# Altium PCB LM2576_BOARD.PcbDoc
Units mm, origin at the board's own origin, x right, y up, seen from the top; angles counter-clockwise.
Board outline 40.28 x 30.25 mm, 2 copper layers (Top Layer, Bottom Layer), stack 1.071 mm thick; 14 components, 5 nets, 39 pads, 35 vias.
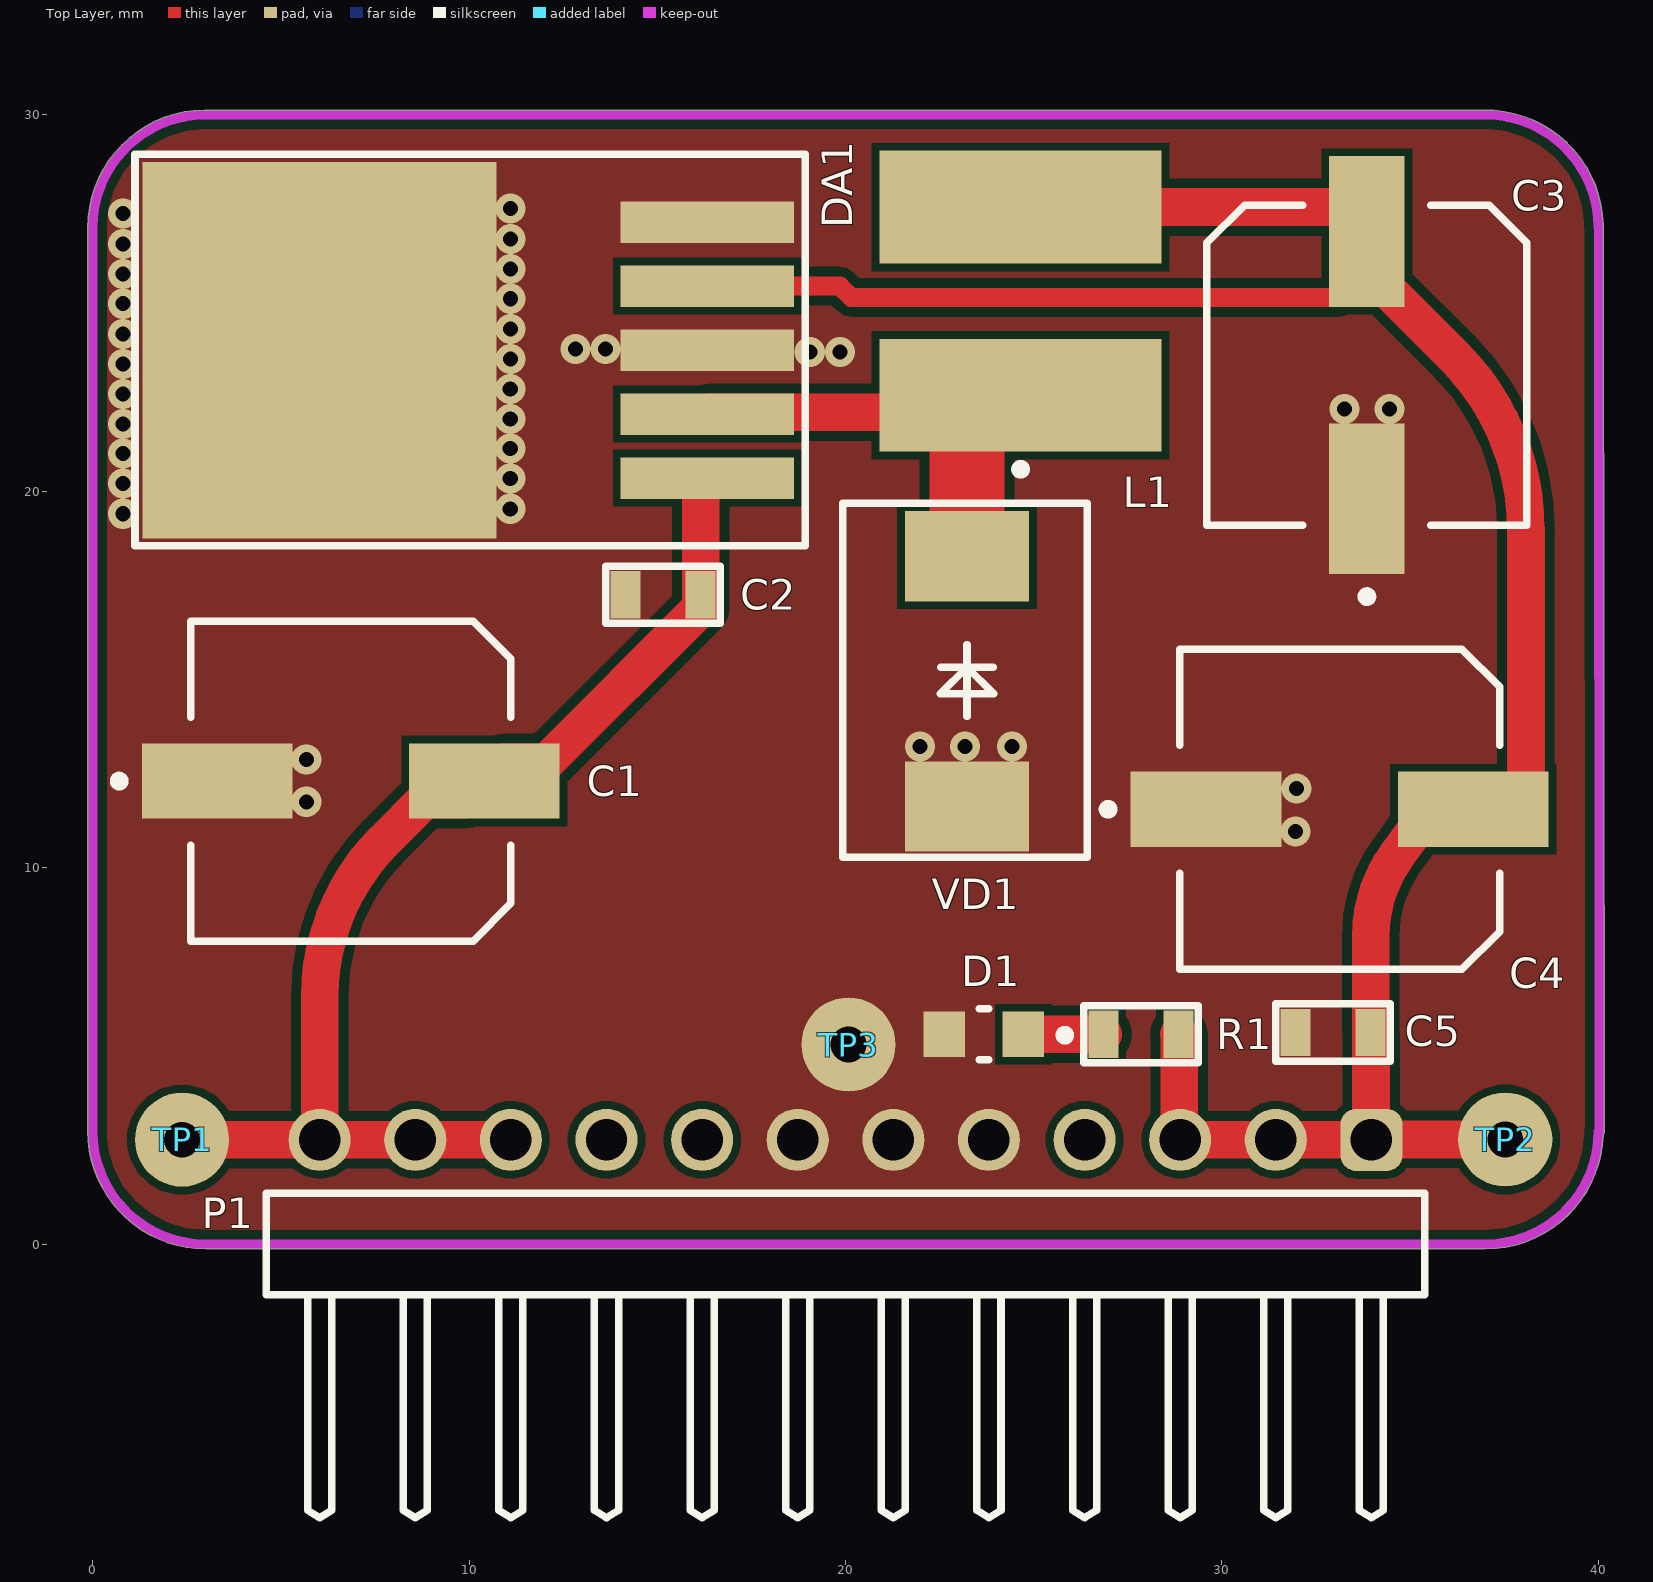
[diagram p0: Top Layer view]
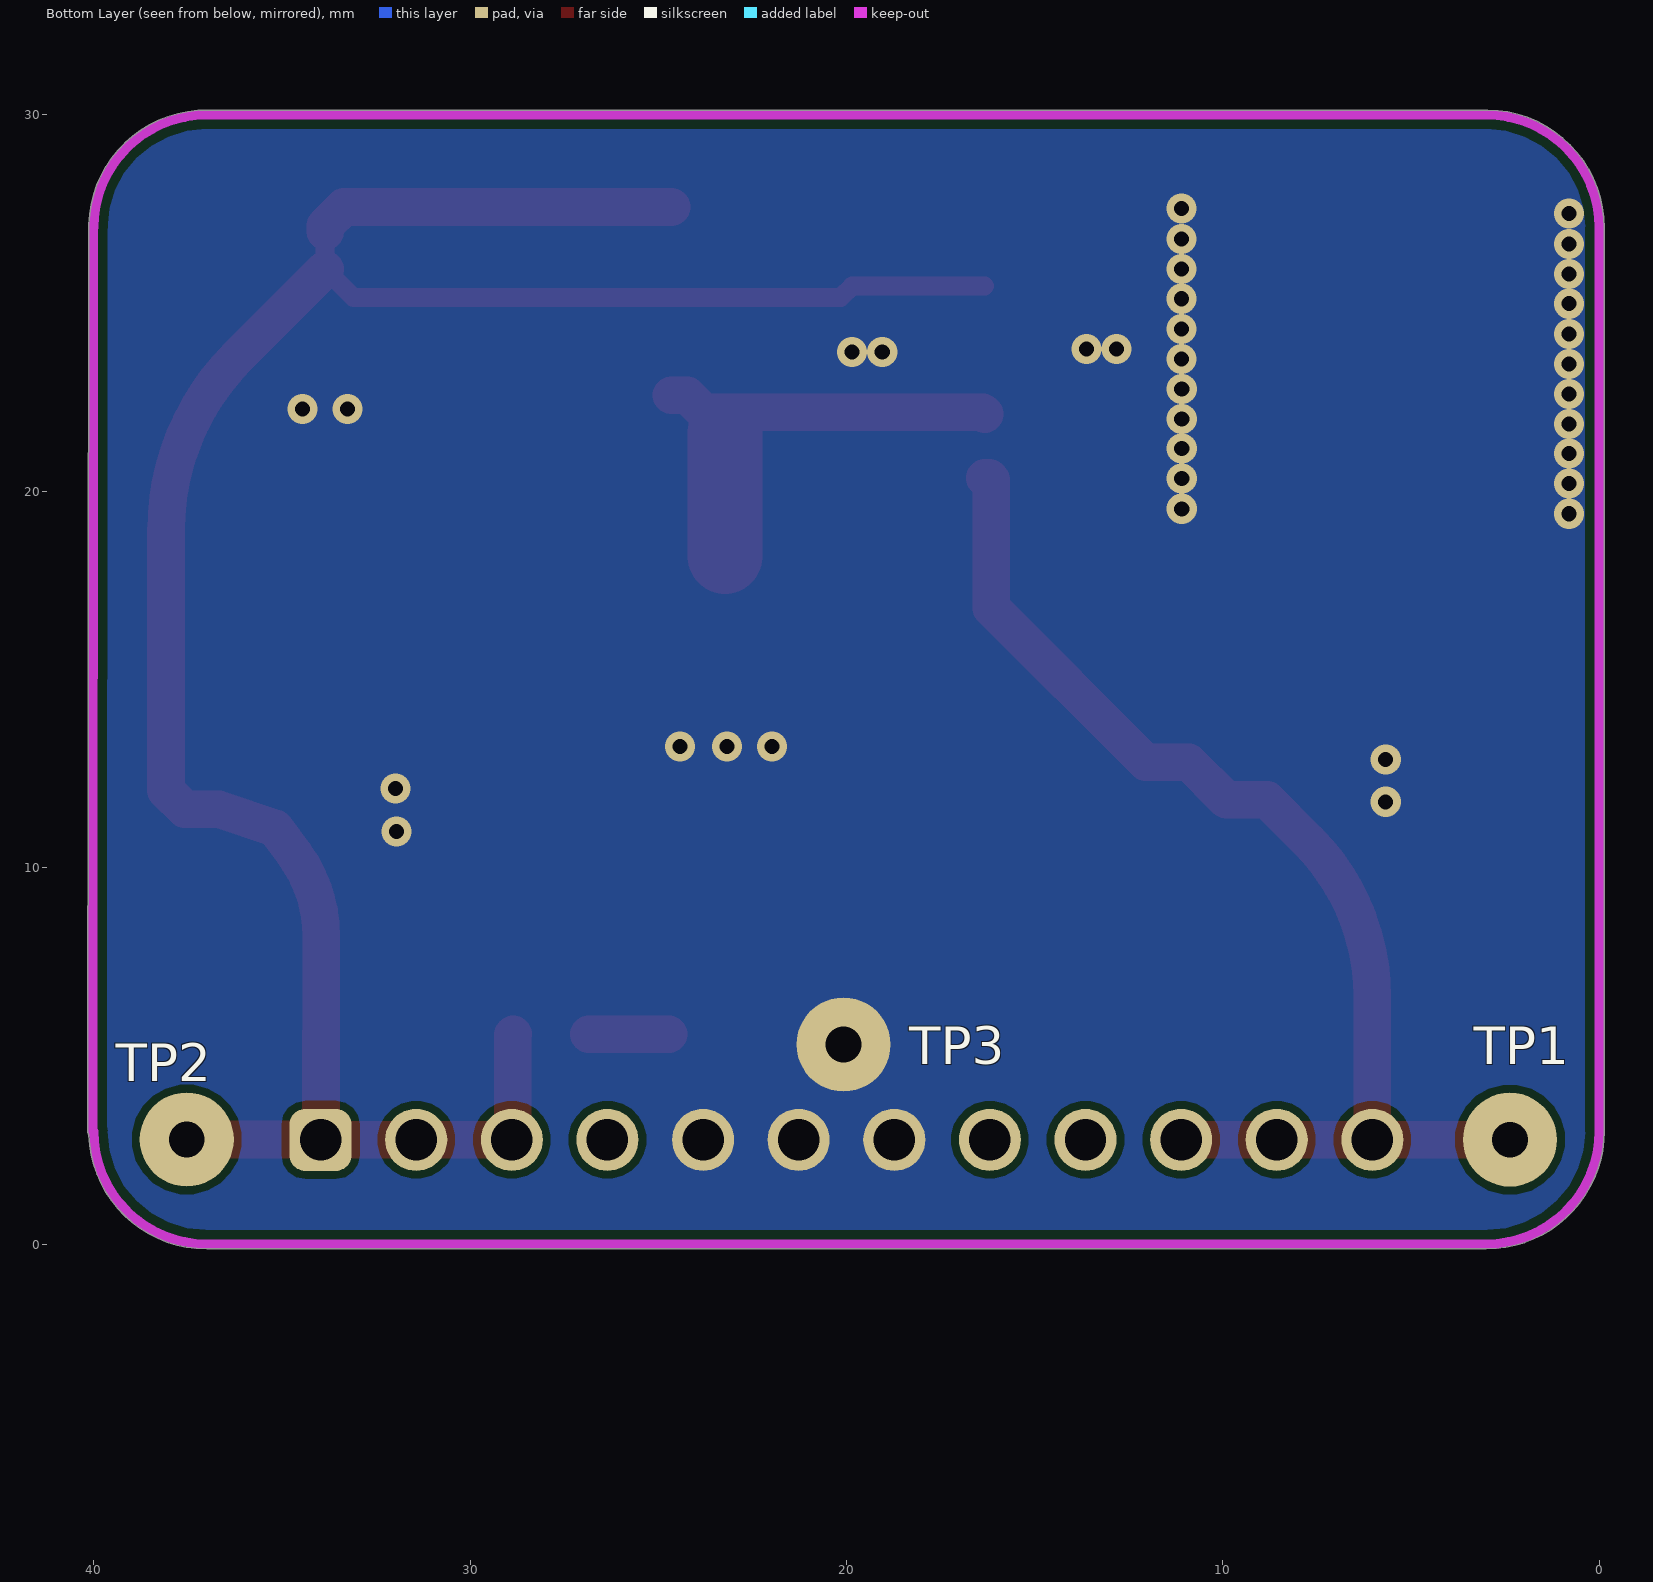
[diagram p1: Bottom Layer view, seen from below]
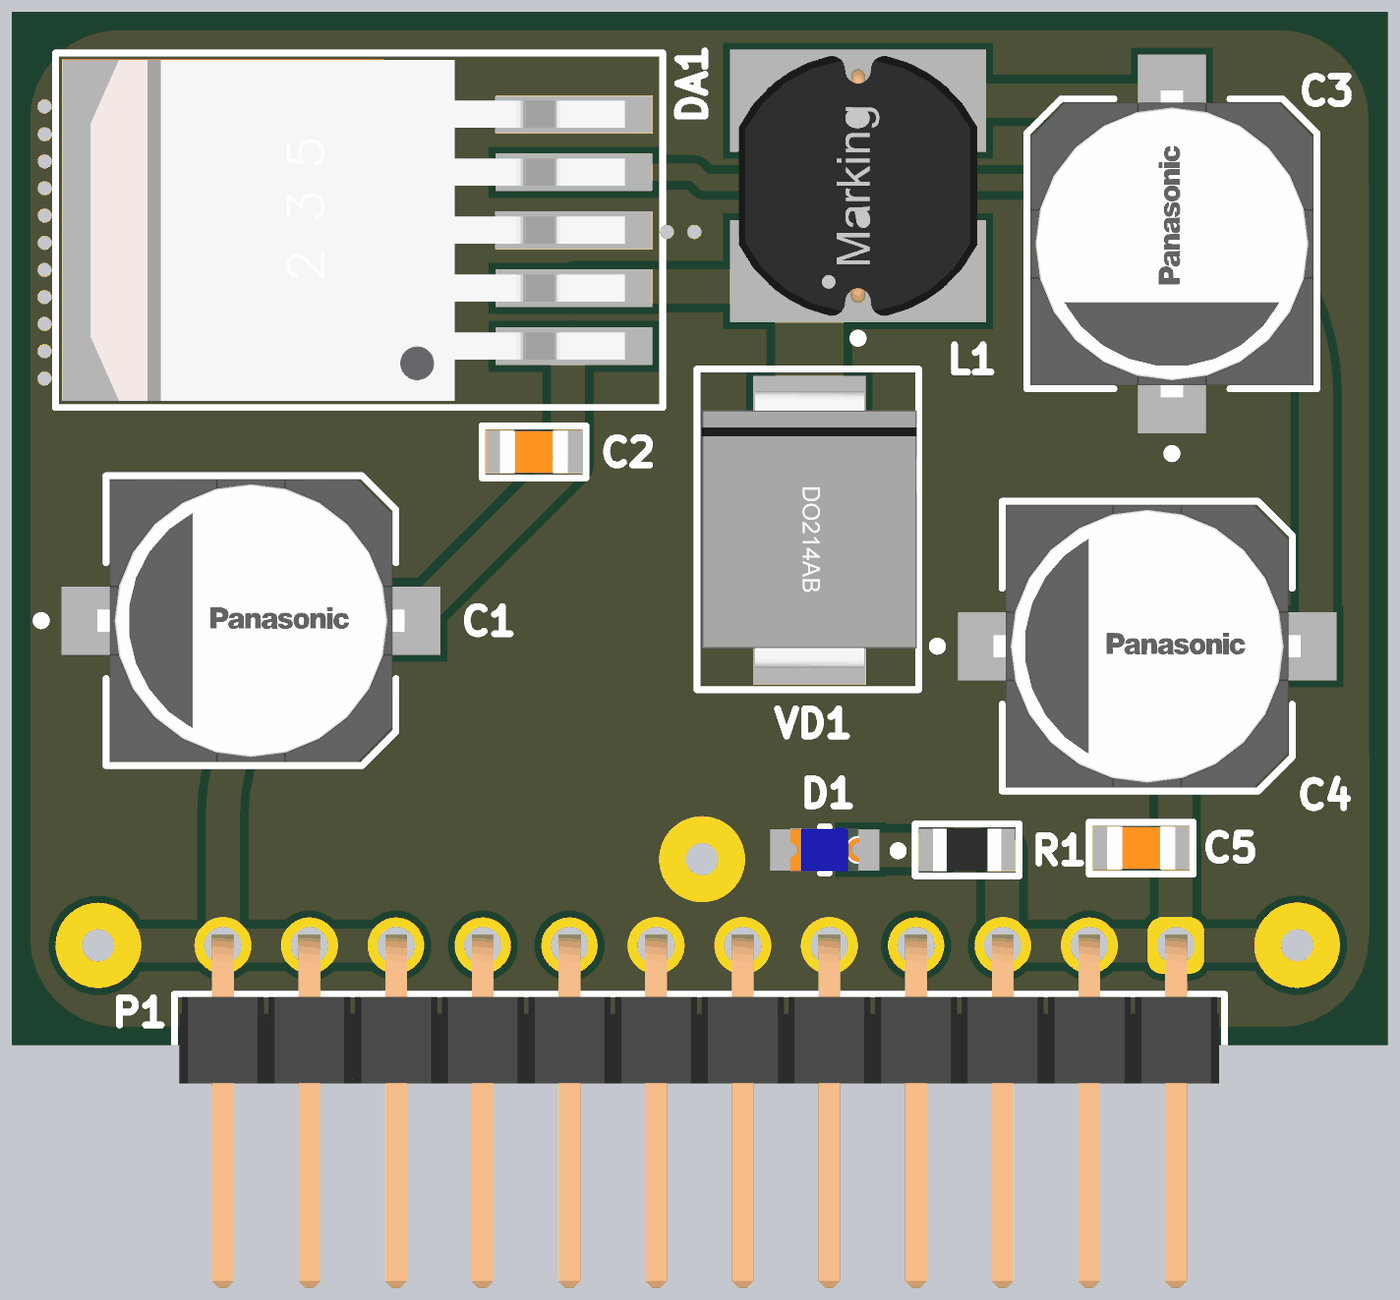
[diagram p2: 3D render of the assembled board from above, using the file's embedded part models]

## Layer stack, top to bottom
Top Solder: solder mask 0.0102, Solder Resist, Dk 3.5
Top Layer: signal copper 0.0356
Dielectric 1: dielectric 1, FR-4, Dk 4.8
Bottom Layer: signal copper 0.0356
Bottom Solder: solder mask 0.0102, Solder Resist, Dk 3.5

## Board outline
-0.127,3 -0.127,27 cw(c3,27) 2.969,30.127 2.975,30.127 37.188,30.127 37.234,30.119 cw(c37,27) 40.126,27.087 40.132,27.05 40.152,2.975 40.126,2.897 cw(c37,3) 37,-0.127 3.001,-0.127 3,-0.127 cw(c3,3)

## Design rules (kind name [scope] priority, off if disabled: settings)
Clearance Clearance_1 [All vs InNet('GND_1')] p1: gap=0.2 ignorepadtopadclearanceinfootprint=FALSE
Clearance [All vs InNet('GND')] p2: gap=0.25 ignorepadtopadclearanceinfootprint=FALSE except(0.2: SMDPad-SMDPad SMDPad-THPad SMDPad-Via SMDPad-Fill SMDPad-Poly SMDPad-Region SMDPad-Text SMDPad-Hole THPad-THPad THPad-Via THPad-Fill THPad-Poly THPad-Region THPad-Text THPad-Hole Text-Text Text-Hole)
ComponentClearance [All] p1: gap=-3 collisioncheckmode=3 verticalgap=0.254 showdistances=FALSE
DiffPairsRouting [All] p1: maxlimit=0.254 minlimit=0.254 mostfreqgap=0.254 substack1={A23D90DD-733B-49C5-8102-56B3D284E3A0} toplayer_{a23d90dd-733b-49c5-8102-56b3d284e3a0}_minwidth=0.381 toplayer_{a23d90dd-733b-49c5-8102-56b3d284e3a0}_maxwidth=0.381 toplayer_{a23d90dd-733b-49c5-8102-56b3d284e3a0}_prefwidth=0.381 bottomlayer_{a23d90dd-733b-49c5-8102-56b3d284e3a0}_minwidth=0.381 bottomlayer_{a23d90dd-733b-49c5-8102-56b3d284e3a0}_maxwidth=0.381 bottomlayer_{a23d90dd-733b-49c5-8102-56b3d284e3a0}_prefwidth=0.381 toplayer_minwidth=0.381 toplayer_maxwidth=0.381 toplayer_prefwidth=0.381 bottomlayer_minwidth=0.381 bottomlayer_maxwidth=0.381 bottomlayer_prefwidth=0.381 substack2={0B3DB408-A969-412D-8C07-BA8AE97219D9} toplayer_{0b3db408-a969-412d-8c07-ba8ae97219d9}_minwidth=0.381 toplayer_{0b3db408-a969-412d-8c07-ba8ae97219d9}_maxwidth=0.381 toplayer_{0b3db408-a969-412d-8c07-ba8ae97219d9}_prefwidth=0.381 bottomlayer_{0b3db408-a969-412d-8c07-ba8ae97219d9}_minwidth=0.381 bottomlayer_{0b3db408-a969-412d-8c07-ba8ae97219d9}_maxwidth=0.381 bottomlayer_{0b3db408-a969-412d-8c07-ba8ae97219d9}_prefwidth=0.381 substack3={378827E6-B38F-4565-9D2F-710D8D441C30} toplayer_{378827e6-b38f-4565-9d2f-710d8d441c30}_minwidth=0.381 toplayer_{378827e6-b38f-4565-9d2f-710d8d441c30}_maxwidth=0.381 toplayer_{378827e6-b38f-4565-9d2f-710d8d441c30}_prefwidth=0.381 bottomlayer_{378827e6-b38f-4565-9d2f-710d8d441c30}_minwidth=0.381 bottomlayer_{378827e6-b38f-4565-9d2f-710d8d441c30}_maxwidth=0.381 bottomlayer_{378827e6-b38f-4565-9d2f-710d8d441c30}_prefwidth=0.381 substack4={1E65D4A7-266F-4925-B814-5E9C4A66F8EE} toplayer_{1e65d4a7-266f-4925-b814-5e9c4a66f8ee}_minwidth=0.381 toplayer_{1e65d4a7-266f-4925-b814-5e9c4a66f8ee}_maxwidth=0.381 toplayer_{1e65d4a7-266f-4925-b814-5e9c4a66f8ee}_prefwidth=0.381 bottomlayer_{1e65d4a7-266f-4925-b814-5e9c4a66f8ee}_minwidth=0.381 bottomlayer_{1e65d4a7-266f-4925-b814-5e9c4a66f8ee}_maxwidth=0.381 bottomlayer_{1e65d4a7-266f-4925-b814-5e9c4a66f8ee}_prefwidth=0.381 substack5={93C5D03E-862D-45F8-9871-970EEA9B3F11} toplayer_{93c5d03e-862d-45f8-9871-970eea9b3f11}_minwidth=0.381 toplayer_{93c5d03e-862d-45f8-9871-970eea9b3f11}_maxwidth=0.381 toplayer_{93c5d03e-862d-45f8-9871-970eea9b3f11}_prefwidth=0.381 bottomlayer_{93c5d03e-862d-45f8-9871-970eea9b3f11}_minwidth=0.381 bottomlayer_{93c5d03e-862d-45f8-9871-970eea9b3f11}_maxwidth=0.381 bottomlayer_{93c5d03e-862d-45f8-9871-970eea9b3f11}_prefwidth=0.381 maxuncoupledlength=12.7
Height [All] p1: minheight=0 maxheight=50 prefheight=33
HoleSize [All] p1: absolutevalues=TRUE maxlimit=6 minlimit=0.01 maxpercent=80.000 minpercent=20.000
HoleToHoleClearance [All] p1: gap=0.1 allowstackedmicrovias=TRUE
MinimumSolderMaskSliver [All] p1: minsoldermaskwidth=0.1
PlaneClearance [All] p1: clearance=0.7
PlaneConnect [All] p1: planeconnectstyle=Direct reliefexpansion=0.5 reliefentries=4 reliefconductorwidth=0.5 reliefairgap=0.15
PolygonConnect VQFN20 [HasFootprint('VQFN20')] p1: connectstyle=Direct reliefconductorwidth=0.254 reliefentries=4 polygonreliefangle="90 Angle" airgapwidth=0.254
PolygonConnect [All] p2: connectstyle=Direct reliefconductorwidth=0.3 reliefentries=4 polygonreliefangle="90 Angle" airgapwidth=0.15
RoutingVias [All] p1: holewidth=0.1 width=0.1 viastyle="Through Hole" minholewidth=0 minwidth=0.3 maxholewidth=2 maxwidth=4
ShortCircuit [All] p1: allowed=TRUE
SilkToSolderMaskClearance [IsPad] p1: minsilkscreentomaskgap=0.1 clearancetoexposedcopper=TRUE
SolderMaskExpansion SolderMaskExpansion_Via [IsVia] p1: expansion=0.102 istentingtop=TRUE
SolderMaskExpansion [All] p2: expansion=0.01 istentingtop=FALSE
UnRoutedNet [All] p1: checkbadconnections=TRUE
Width [All] p1: maxlimit=5 minlimit=0.2 preferedwidth=0.3 substack1={A23D90DD-733B-49C5-8102-56B3D284E3A0} substack2={0B3DB408-A969-412D-8C07-BA8AE97219D9} substack3={378827E6-B38F-4565-9D2F-710D8D441C30} substack4={1E65D4A7-266F-4925-B814-5E9C4A66F8EE} substack5={93C5D03E-862D-45F8-9871-970EEA9B3F11}
19 further rules are at their usual default settings.

## Components (designator, comment, footprint, x,y, rotation, side; value= is the part's Value field where it differs from the comment)
C1 "CAP-POLAR" SIZE_EEE 6.855,12.3 r0 top
C2 "330" CAP-0805 15.15,17.25 r0 top
C3 "CAP-POLAR" SIZE_EEE 33.85,23.35 r90 top
C4 "CAP-POLAR" SIZE_EEE 33.125,11.55 r0 top
C5 "330" CAP-0805 32.95,5.625 r0 top
D1 "151031YS06000" LED_BLUE 23.675,5.575 r180 top
DA1 "LM2576" TO-263-5 12.825,23.75 r90 top
L1 "47µH, 1.17A" WE-PD2_7850 24.65,25.05 r90 top
P1 "61301211021" 61301211021 20,0 r0 top
R1 "5.1K" RES-0805 27.85,5.575 r0 top
TP1 "" Test_Point 2.375,2.775 r0 top
TP2 "" Test_Point 37.525,2.78 r0 top
TP3 "" Test_Point 20.077,5.302 r0 top
VD1 "DIODE" DO-214AB 23.227,14.975 r270 top

## Footprints (in the part's own frame and the unit in brackets; to place one, negate y for a bottom-side part, rotate by r counter-clockwise, add the part's x,y. Pads: shape width x height; smd on the part's side, far side on the other; paste and mask are expansions set on the pad)
61301211021 [mm] "Pin Header, pitch 2.54 mm, THT, Angled, single row, 12p"
  rrect50% 1.65x1.65 hole 1.1: 1(13.97,2.77)
  round 1.65 hole 1.1: 2(11.43,2.77) 3(8.89,2.77) 4(6.35,2.77) 5(3.81,2.77) 6(1.27,2.77) 7(-1.27,2.77) 8(-3.81,2.77) 9(-6.35,2.77) 10(-8.89,2.77) 11(-11.43,2.77) 12(-13.97,2.77)
  silkscreen extent -15.39,-7.27 15.39,1.35, body extent -15.24,-7.27 15.24,3.09, height 2.58
CAP-0805 [mm]
  rect 0.8x1.25 smd mask+0.015: 1(-1,0) 2(1,0)
  silkscreen extent -1.52,-0.76 1.52,0.76, body extent -1,-0.62 1,0.63, height 0.8
DO-214AB [mm]
  rect 2.4x3.3 smd: 1(-3.3,0) 2(3.35,0)
  silkscreen extent -4.7,-3.3 4.7,3.2, body extent -4.06,-3.15 4.06,3.15, height 2.67
LED_BLUE [mm]
  rect 1.1x1.2 smd paste+0 mask+0: 1(-1.05,0) 2(1.05,0)
  silkscreen extent -2.28,-0.67 0.13,0.67, body extent -1,-0.63 1,0.63, height 0.8
RES-0805 [mm]
  rect 0.8x1.25 smd mask+0.015: 1(-1,0) 2(1,0)
  silkscreen extent -1.52,-0.76 1.52,0.76, body extent -1,-0.62 1,0.63, height 0.6
SIZE_EEE [mm]
  rect 4x2 smd paste+0 mask+0: 1(3.55,0) 2(-3.55,0)
  silkscreen extent -6.27,-4.25 4.25,4.25, body extent -4.5,-4.15 4.5,4.15, height 6.5
Test_Point [mm]
  round 2.5 hole 0.95: 1(0,0)
TO-263-5 [mm]
  rect 1.1x4.6 smd: 1(-3.4,-3.5) 2(-1.7,-3.5) 3(0,-3.5) 4(1.7,-3.5) 5(3.4,-3.5)
  rect 10x9.4 smd: 3(0,6.8)
  silkscreen extent -5.2,-6.1 5.2,11.7, body extent -5,-4.99 5,10.68, height 4.88
WE-PD2_7850 [mm] "SMD Power Inductor, 2-Leads, body 7.8x7mm"
  rect 3x7.5 smd: 1(-2.5,0) 2(2.5,0)
  silkscreen extent -4.59,-0.13 -4.34,0.12, body extent -3.81,-3.5 3.81,3.5, height 4.95

## Part data
C2 C5: library part CAP-NON-POLAR
D1: library part LED, "WURTH ELEKTRONIK - 151031YS06000 - LED, Yellow, Through Hole, T-1 (3mm), 30 mA, 2 V, 590 nm", Manufacturer_Name="Wurth Elektronik", Mouser Part Number=710-151031YS06000, Datasheet Link=https://katalog.we-online.de/led/datasheet/151031YS06000.pdf, Geometry.Height=5.5mm, Manufacturer_Part_Number=151031YS06000, Mouser Price/Stock=https://www.mouser.co.uk/ProductDetail/Wurth-Elektronik/151031YS06000?qs=LlUlMxKIyB3xSYYW%252BcuBiQ%3D%3D
L1: library part 744775147, "WE-PD2 SMT Power Inductor, size 7850, 47µH, 1.17A, 0.18Ω", Case/Size Code=7850, DC Resistance=0.134Ω, DC Resistance Max=0.18Ω, Inductance=47µH, Manufacturer="Wurth Elektronik", Operating Temperature Max=125°C, Operating Temperature Min=-40°C, Rated Current=1.17A, Saturation Current=1.24A, Self Resonant Frequency=12MHz, Category="Unshielded Power Inductors", ComponentLink1Description="Website Link", ComponentLink1URL=https://www.we-online.com/redexpert/article/744775147?ad, ComponentLink2Description="Datasheet Link", ComponentLink2URL=https://www.we-online.com/redexpert/spec/744775147?ad, Height=4.95mm, Length=7.8mm, Manufacturer Part Number=744775147, Match Code=WE-PD2, Mount="Surface Mount", Packaging="Tape and Reel", Width=7mm
P1: "WR-PHD Pin Header, THT, Angled, pitch 2.54mm, 1 Row, 12P", Contact Resistance=20mΩ, Manufacturer="Wurth Elektronik", Operating Temperature Max=105°C, Operating Temperature Min=-40°C, Rated Current=3A, Withstanding Voltage=500V, Working Voltage=250V, Category="Board-to-Board Connectors", ComponentLink1Description="Website Link", ComponentLink1URL=https://www.we-online.com/redexpert/article/61301211021?ad, ComponentLink2Description="Datasheet Link", ComponentLink2URL=https://www.we-online.com/redexpert/spec/61301211021?ad, Gender="Pin Header", Manufacturer Part Number=61301211021, Match Code=WR-PHD, Mount="Through Hole", Number of Pins=12, Number of Rows=1, Orientation=Angled, Packaging=Bag, Pitch=2.54mm
R1: library part RES-CONST
TP1 TP2 TP3: library part TP_PCB?, "Test_Point"

## Via types
v1: diameter 0.8, hole 0.4, Top Layer to Bottom Layer, tented both sides, 35 vias

## Nets (pads, with @x,y where several pads share a name; then routed paths per layer and width w, separated by ;. In a path a pad name is that pad's centre, name@x,y a point inside that pad or via, vN(x,y) a via of type N, cw(c..) or ccw(c..) an arc to the next point about the centre after c; other vN are vias at no path point)
GND: C1.2 C2.1 C3.2 C4.2 C5.1 D1.2 DA1.3 DA1.5 P1.5 P1.6 P1.7 TP3.1 VD1.2
  other v1: 31.953,10.964 5.675,11.75 31.975,12.1 5.675,12.875 21.975,13.214 23.175,13.214 24.425,13.214 0.803,19.402 11.093,19.534 0.803,20.202 11.093,20.334 0.803,21.002 11.093,21.134 0.803,21.788 11.093,21.92 33.253,22.189 34.453,22.189 0.803,22.588 11.093,22.72 0.809,23.382 11.099,23.514 19.05,23.7 19.85,23.7 12.825,23.775 13.625,23.775 0.809,24.182 11.099,24.314 0.809,24.982 11.099,25.114 0.809,25.768 11.099,25.9 0.809,26.568 11.099,26.7 0.806,27.382 11.096,27.514
IN: C1.1 C2.2 DA1.1 P1.10 P1.11 P1.12 TP1.1 | length 31.7
  Top Layer w1: TP1.1 2.377,2.773 P1.12@6.03,2.773 ; P1.12 P1.12@6.03,2.773 ; P1.10 11.107,2.773 8.57,2.773 P1.12@6.03,2.773 ; DA1.1 16.2,20.35 16.15,20.3 16.15,16.9 12.05,12.8 10.905,12.8 9.905,11.8 8.825,11.8 7.756,10.731 ccw(c11.924,6.564) 6.03,6.564 6.03,6.561 P1.12@6.03,2.773
NetD1_1: D1.1 R1.1 | length 2.1
  Top Layer w1: D1.1 R1.1
NetDA1_2: DA1.2 L1.1 VD1.1 | length 12.6
  Top Layer w1: DA1.2 16.375,22.1 L1.1@23.777,22.1 ; L1.1@23.227,21.55 L1.1@23.777,22.1 ; L1.1 24.227,22.55 L1.1@23.777,22.1
  Top Layer w2: VD1.1 L1.1@23.227,21.55
OUT: C3.1 C4.1 C5.2 DA1.4 L1.2 P1.1 P1.2 P1.3 R1.2 TP2.1 | length 67.1
  Top Layer w0.5: DA1.4 19.85,25.45 20.15,25.15 33.1,25.15 33.85,25.9 C3.1
  Top Layer w1: L1.2 33.35,27.55 33.85,27.05 C3.1 ; R1.2 28.87,5.555 28.87,2.79 P1.3 P1.2 P1.1 33.96,2.78 33.96,5.615 C5.2 33.95,8.173 33.95,8.176 cw(c37.63,8.176) 34.664,10.354 35.175,11.05 C4.1 37.575,11.55 38.075,12.05 38.075,18.963 ccw(c31.527,18.963) 36.158,23.592 36.155,23.595 C3.1@33.85,25.9 ; P1.1@33.98,2.78 TP2.1
pads on no net: P1.4 P1.8 P1.9

## Polygon pours and split planes (outlines as drawn)
GND on Bottom Layer "NONET_L-01_P-001" (solid, pour order 0): -0.125,-0.127 -0.125,30.127 40.175,30.127 40.175,-0.127
GND on Top Layer "NONET_L-01_P-001" (solid, pour order 1): -0.125,-0.127 -0.125,30.127 40.175,30.127 40.175,-0.127

## Keep-outs
Keep-Out Layer:
  lines w0.254: 2.975,30 37.188,30 ; 3,30 ccw(c3,27) 0,27 0,3 ccw(c3,3) 3,0 37,0 ccw(c37,3) 40,3 ; 37,30 cw(c37,27) 40,27 ; 40.004,27.05 40.025,2.975